# EAGLE board PT100-SensorPCB008 (EAGLE 7.5.0)
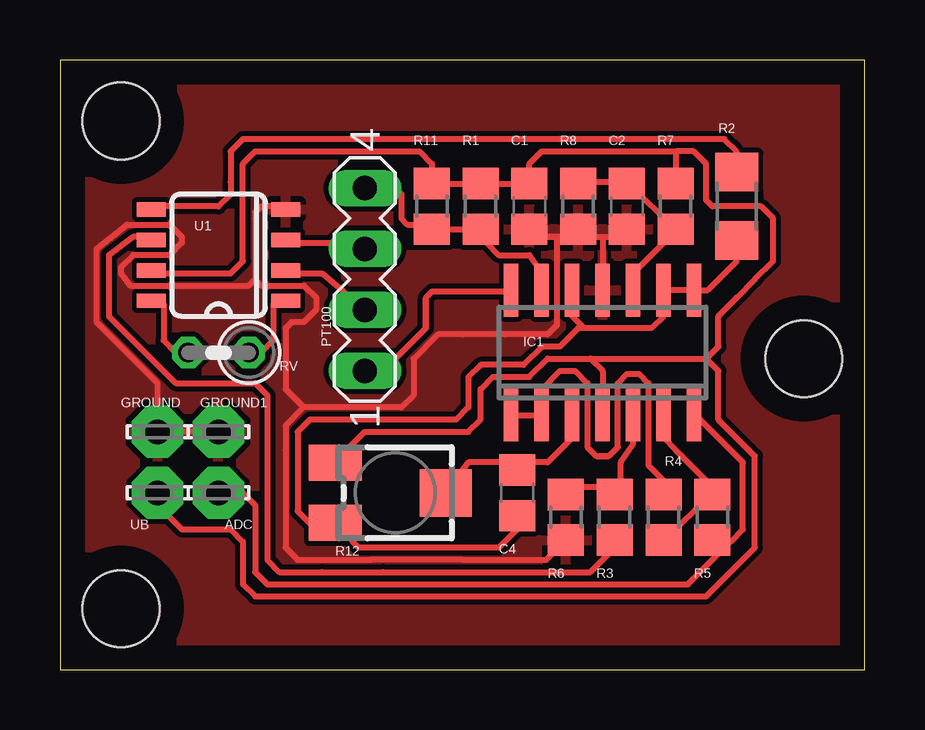
[diagram p0: board, top side]

Size 33.53 x 25.4 mm. Coordinates in mm from the lower left corner, seen from the top.
Outline: 0,0 33.53,0 33.53,25.4 0,25.4 0,0
Copper layers (1*16): Top 0.035mm / dielectric 1.5mm / Bottom 0.035mm
Design rules "default": minimum track width 10mil, minimum drill 24mil, track to track 8mil, track to pad 8mil, pad to pad 8mil, via to via 8mil, smd to smd 8mil, copper to edge 40mil, drill to drill 8mil, minimum pad ring 10mil, minimum via ring 8mil, stop-mask expansion 4mil, vias tented up to drill 0mil, thermal gap 10mil
Holes 3.2 mm at 30.99,12.95 2.54,22.86 2.54,2.54
tRestrict: area 12.7,5.3 to 16.3,9.4; area 11.4,5.8 to 14.2,9.4

## Footprints (pad centres in the part's own frame; a part is rotated, then mirrored left to right if it is on the bottom)
LSP10 = drill 1.016 pad 2.159 octagon: MP 0,0
C0805 = smd 1.3 x 1.5: 1 -0.95,0; 2 0.95,0
SO14 = smd 0.6 x 2.2: 1 -3.81,-2.6; 2 -2.54,-2.6; 3 -1.27,-2.6; 4 0,-2.6; 5 1.27,-2.6; 6 2.54,-2.6; 7 3.81,-2.6; 8 3.81,2.6; 9 2.54,2.6; 10 1.27,2.6; 11 0,2.6; 12 -1.27,2.6; 13 -2.54,2.6; 14 -3.81,2.6
MA04-1 = drill 1.016 long: 1 -3.81,0; 2 -1.27,0; 3 1.27,0; 4 3.81,0
R0805 = smd 1.3 x 1.5: 1 -0.95,0; 2 0.95,0
R1206 = smd 1.6 x 1.803: 1 -1.422,0; 2 1.422,0
RTRIM3374 = smd 1.5 x 2.2: 1 -1.25,-2.5; 3 1.25,-2.5 | smd 1.98 x 2.17: 2 0,2.1
0207/2V = drill 0.813 octagon: 1 -1.27,0; 2 1.27,0
SO08-TIGHT = smd 0.6 x 1.2: 1 -1.905,-2.8; 2 -0.635,-2.8; 3 0.635,-2.8; 4 1.905,-2.8; 5 1.905,2.8; 6 0.635,2.8; 7 -0.635,2.8; 8 -1.905,2.8

## Placement (x,y rotation side)
ADC  LSP10  [LSP10]  6.6,7.37 0 top
C1  100n  [C0805]  19.56,19.3 270 top
C2  100n  [C0805]  23.62,19.3 270 top
C4  100n  [C0805]  19.05,7.37 270 top
GROUND  LSP10  [LSP10]  4.06,9.91 0 top
GROUND1  LSP10  [LSP10]  6.6,9.91 0 top
IC1  TS914  [SO14]  22.61,13.21 0 top
PT100  [MA04-1]  12.7,16.26 90 top
R1  3k  [R0805]  17.53,19.3 90 top
R2  0  [R1206]  28.19,19.3 270 top
R3  1,8k  [R0805]  23.11,6.35 270 top
R4  1,8k  [R0805]  25.15,6.35 90 top
R5  15k  [R0805]  27.18,6.35 90 top
R6  15k  [R0805]  21.08,6.35 270 top
R7  15k  [R0805]  25.65,19.3 270 top
R8  15k  [R0805]  21.59,19.3 270 top
R11  15k  [R0805]  15.49,19.3 90 top
R12  5k  [RTRIM3374]  13.97,7.37 270 top
RV  5,49k  [0207/2V]  6.6,13.21 180 top
U1  AD620  [SO08-TIGHT]  6.6,17.27 90 top
UB  LSP10  [LSP10]  4.06,7.37 0 top

## Library data of the parts
ADC GROUND GROUND1 UB = solpad
C1 C2 C4 R1-R8 R11 R12 = rcl
IC1 = linear
PT100 = con-lstb; OC_FARNELL: unknown; OC_NEWARK: unknown
RV = resistor
U1 = SparkFun-AnalogIC; PROD_ID: IC-13132

## Nets
+3V3: C1.1 IC1.4 R1.2 R7.1 R11.2 R12.1 U1.7 UB.MP
GND: C1.2 C2.2 GROUND1.MP GROUND.MP IC1.11 R6.2 R8.2 U1.4
INST_A: R3.2 U1.6
INST_E-NEG: IC1.13 PT100.4 R1.1 R11.1
INST_E-POS: PT100.2 U1.2
N$1: RV.2 U1.8
N$2: RV.1 U1.1
N$3: IC1.14 PT100.1
N$4: R2.1 U1.5
N$5: PT100.3 U1.3
N$6: C4.1 IC1.3 R12.2
N$7: IC1.6 R4.1 R5.2
N$8: IC1.5 R3.1 R6.1
N$9: ADC.MP IC1.7 R5.1
N$12: C2.1 IC1.10 R7.2 R8.1
SYMGND: C4.2 IC1.8 IC1.9 IC1.12 R2.2 R12.3
UREF: IC1.1 IC1.2 R4.2

## Tracks (layer width: path | path; a pad name or v marks a point on that pad's centre or on a via)
+3V3
  Top 0.254: 22.1,12.95 20.32,12.95 19.56,12.19 18.03,12.19 17.53,11.68 17.53,10.41 17.02,9.91 12.7,9.91 11.66,8.87 11.66,8.81 R12.1 | 22.1,12.95 22.61,12.45 IC1.4 | 25.65,20.57 25.65,20.32 | 25.65,20.32 R7.1 25.65,20.32 | 22.1,12.95 26.92,12.95 | 26.92,12.95 27.43,13.46 27.43,14.73 28.19,15.49 28.96,16.26 29.72,17.02 29.72,18.8 29.21,19.3 27.18,19.3 26.92,19.56 26.92,21.08 26.42,21.59 25.65,21.59 | 25.65,21.59 25.65,20.57 | 25.65,20.57 25.65,20.32 | U1.7 3.81,16.51 7.11,16.51 7.62,17.02 7.62,21.08 8.13,21.59 8.64,21.59 14.99,21.59 15.49,21.08 R11.2 R1.2 C1.1 19.56,21.08 19.81,21.34 20.07,21.59 25.15,21.59 25.65,21.59 | UB.MP 4.06,6.86 4.83,6.1 5.08,5.84 7.11,5.84 7.62,5.33 7.62,3.56 8.13,3.05 26.92,3.05 28.96,5.08 28.96,8.89 28.7,9.14 27.43,10.41 27.43,12.45 26.92,12.95
GND
  Top 0.254: R8.2 21.84,18.03 | 21.84,18.03 22.61,18.03 | 22.61,18.03 IC1.11 | R8.2 21.59,18.29 21.34,18.29 21.21,18.03 20.7,18.03 | 20.7,18.03 20.07,18.03 | 20.07,18.03 20.7,18.03 | 20.7,18.03 20.7,14.35 20.57,14.22 20.32,13.97 18.54,13.97 16.76,13.97 15.75,13.97 14.73,12.95 14.73,11.43 14.22,10.92 10.16,10.92 | U1.4 9.14,19.3 8.38,19.3 8.13,19.05 8.13,18.8 8.13,16.26 | 8.13,16.26 8.38,16 10.16,16 10.67,15.49 10.67,14.99 10.16,14.48 9.65,14.48 9.4,14.22 9.4,11.68 10.16,10.92 | 10.16,10.92 9.4,10.16 | 9.4,10.16 9.4,9.14 | 9.4,9.14 9.4,5.08 9.91,4.57 12.95,4.57 16.76,4.57 20.25,4.57 R6.2 21.52,5.08 | 8.13,16.26 7.87,16 2.92,16 2.54,16.51 2.54,16.76 3.05,17.27 4.57,17.27 5.08,17.78 5.08,18.03 4.57,18.54 2.79,18.54 1.52,17.53 1.52,14.48 4.06,11.94 GROUND.MP GROUND1.MP | C1.2 19.56,18.29 20.07,18.03 | R8.2 21.78,18.1 21.84,18.03 | 21.84,18.03 22.1,18.03 22.61,18.03 | 22.61,18.03 23.11,18.03 23.18,18.1 23.18,18.35 C2.2 | 9.4,10.16 9.4,9.14
  pour Top: 33.53,0 0,0 0,25.4 33.53,25.4
INST_A
  Top 0.254: U1.6 3.81,18.03 3.05,18.03 2.03,17.27 2.03,14.73 4.83,11.94 8.13,11.94 8.64,11.43 8.64,4.57 9.14,4.06 10.92,4.06 13.46,4.06 22.1,4.06 22.86,4.83 R3.2
INST_E-NEG
  Top 0.254: IC1.13 20.07,16.51 19.56,17.27 18.29,17.27 17.78,17.78 17.53,18.29 R1.1 R11.1 14.99,18.54 14.48,18.54 14.22,18.8 14.22,19.81 13.97,20.07 13.21,20.07 PT100.4
INST_E-POS
  Top 0.254: U1.2 9.65,16.64 9.65,16.51 10.92,16.51 PT100.2
N$1
  Top 0.254: U1.8 3.81,15.49 4.06,15.49 4.32,15.24 4.32,13.72 4.83,13.21 RV.2
N$2
  Top 0.254: U1.1 9.4,15.49 8.89,15.24 8.89,13.72 8.38,13.21 RV.1
N$3
  Top 0.254: IC1.14 18.8,15.75 15.49,15.75 15.24,15.49 | 15.24,15.49 15.24,14.22 | 15.24,14.22 15.24,15.49 | 15.24,15.49 15.24,14.22 | 15.24,14.22 13.46,12.45 PT100.1
N$4
  Top 0.254: R2.1 28.19,21.59 27.69,22.1 19.81,22.1 7.62,22.1 7.11,21.59 7.11,20.32 7.11,19.81 6.6,19.3 3.81,19.3 U1.5
N$5
  Top 0.254: U1.3 9.65,17.91 9.65,17.78 12.45,17.78 PT100.3
N$6
  Top 0.254: IC1.3 21.34,9.91 | 21.34,9.91 21.34,9.65 | 21.34,9.65 21.34,9.91 | 21.34,9.91 21.34,9.65 | 21.34,9.65 20.32,8.64 19.12,8.64 C4.1 19.05,8.64 18.8,8.64 17.02,8.64 R12.2
N$7
  Top 0.254: IC1.6 25.15,9.65 25.65,9.14 25.91,8.89 26.42,8.38 27.18,7.62 R5.2 26.74,6.86 26.67,6.86 25.65,5.84 25.21,5.4 R4.1
N$8
  Top 0.254: 23.62,7.62 R3.1 23.62,7.62 | 23.62,7.62 23.37,7.62 | 23.37,7.62 23.37,8.64 23.88,9.4 23.88,10.41 IC1.5 | R6.1 21.59,7.62 23.37,7.62 | 23.37,7.62 23.62,7.62
N$9
  Top 0.254: IC1.7 26.42,10.41 26.67,10.41 28.45,8.64 28.45,5.84 27.94,5.33 27.69,5.08 | ADC.MP 7.62,7.37 8.13,6.86 8.13,4.06 8.64,3.56 26.16,3.56 27.69,5.08 | R5.1 27.37,5.4 27.69,5.08
N$12
  Top 0.254: R8.1 21.84,20.32 | 21.84,20.32 23.62,20.32 | 23.62,20.32 24.13,19.81 25.15,18.8 R7.2 25.65,18.29 25.65,18.03 25.15,17.78 24.13,16.76 23.88,16.76 IC1.10 | 21.84,20.32 23.62,20.32 | 23.62,20.32 C2.1
SYMGND
  Top 0.254: 21.84,14.22 24.64,14.22 25.15,14.73 IC1.9 IC1.8 26.98,15.81 28.19,17.02 R2.2 | 21.84,14.22 21.34,14.73 IC1.12 | C4.2 19.05,5.84 18.29,5.08 12.45,5.08 12.19,5.34 12.19,5.4 R12.3 11.45,6.1 10.41,6.1 9.91,6.6 9.91,9.91 10.41,10.41 16.51,10.41 17.02,10.92 17.02,12.19 17.53,12.7 19.3,12.7 20.07,13.46 20.83,13.46 21.59,14.22 21.84,14.22
UREF
  Top 0.254: IC1.1 IC1.2 20.07,11.68 20.83,12.45 21.46,12.45 21.97,11.94 21.97,9.27 22.35,8.89 | 22.35,8.89 22.86,8.89 | 22.86,8.89 23.24,9.27 23.24,11.94 23.62,12.32 24.13,12.32 24.51,11.94 24.51,9.02 24.51,8.51 25.15,7.87 R4.2 | 22.86,8.89 22.35,8.89